# Altium PCB Manipulator.PcbDoc
Units mm, origin at the board's own origin, x right, y up, seen from the top; angles counter-clockwise.
Board outline 152.4 x 101.6 mm, 2 copper layers (Top Layer, Bottom Layer); 54 components, 41 nets, 186 pads, 0 vias.
Unrouted connection lines stored in the file: 137.
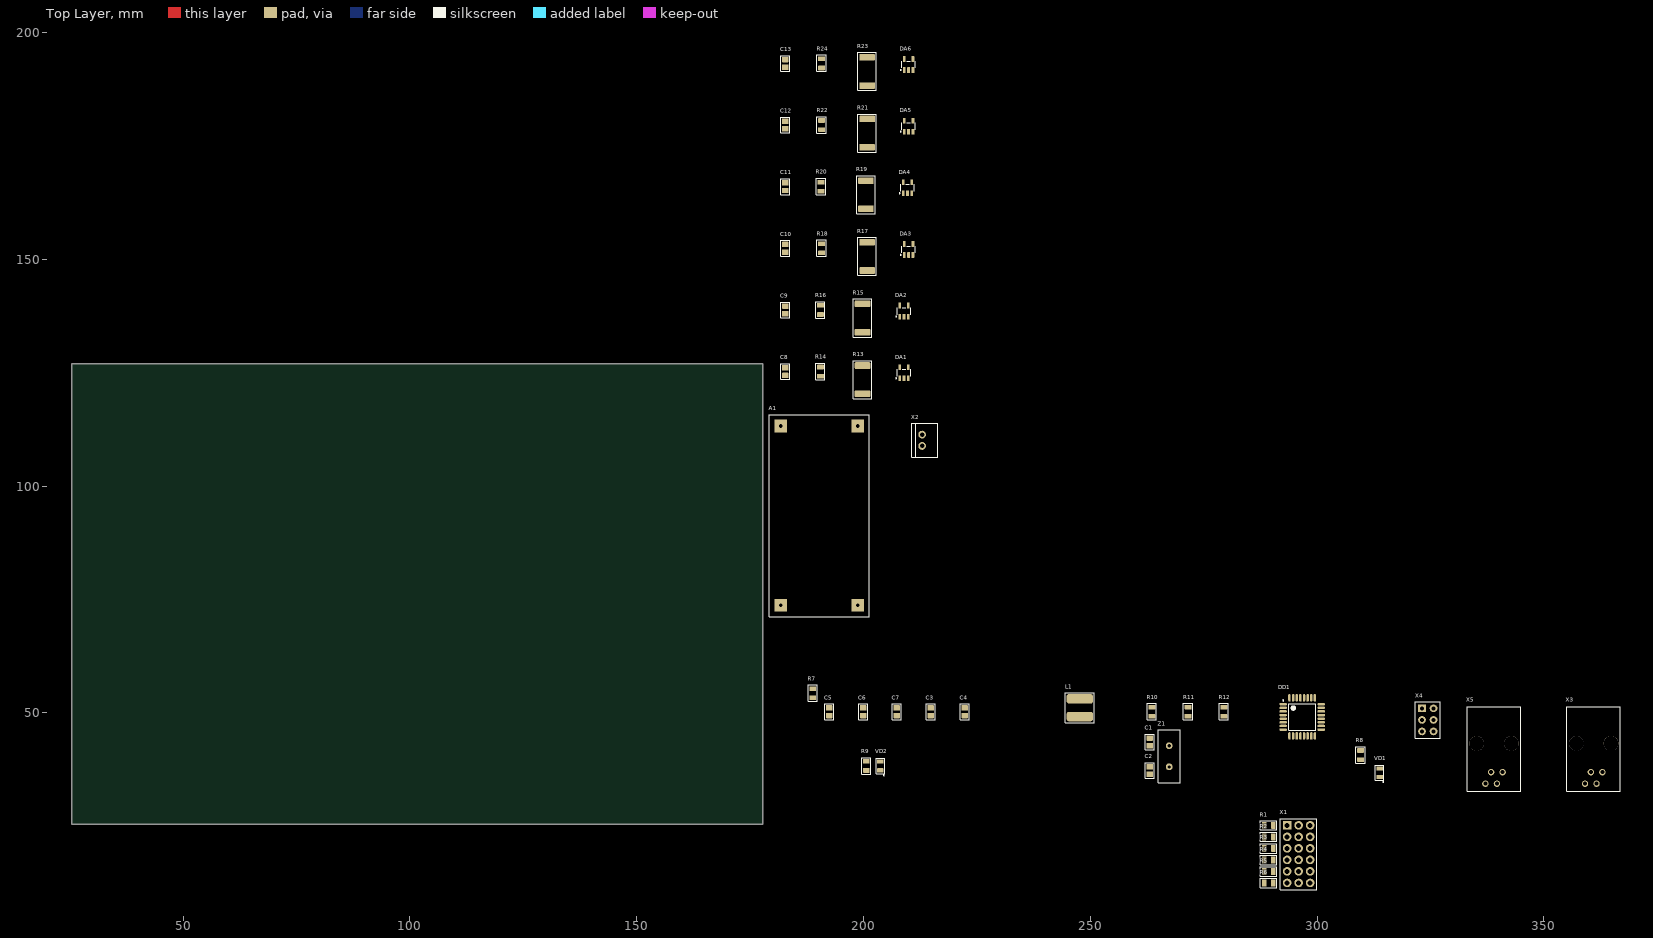
[diagram p0: Top Layer view]
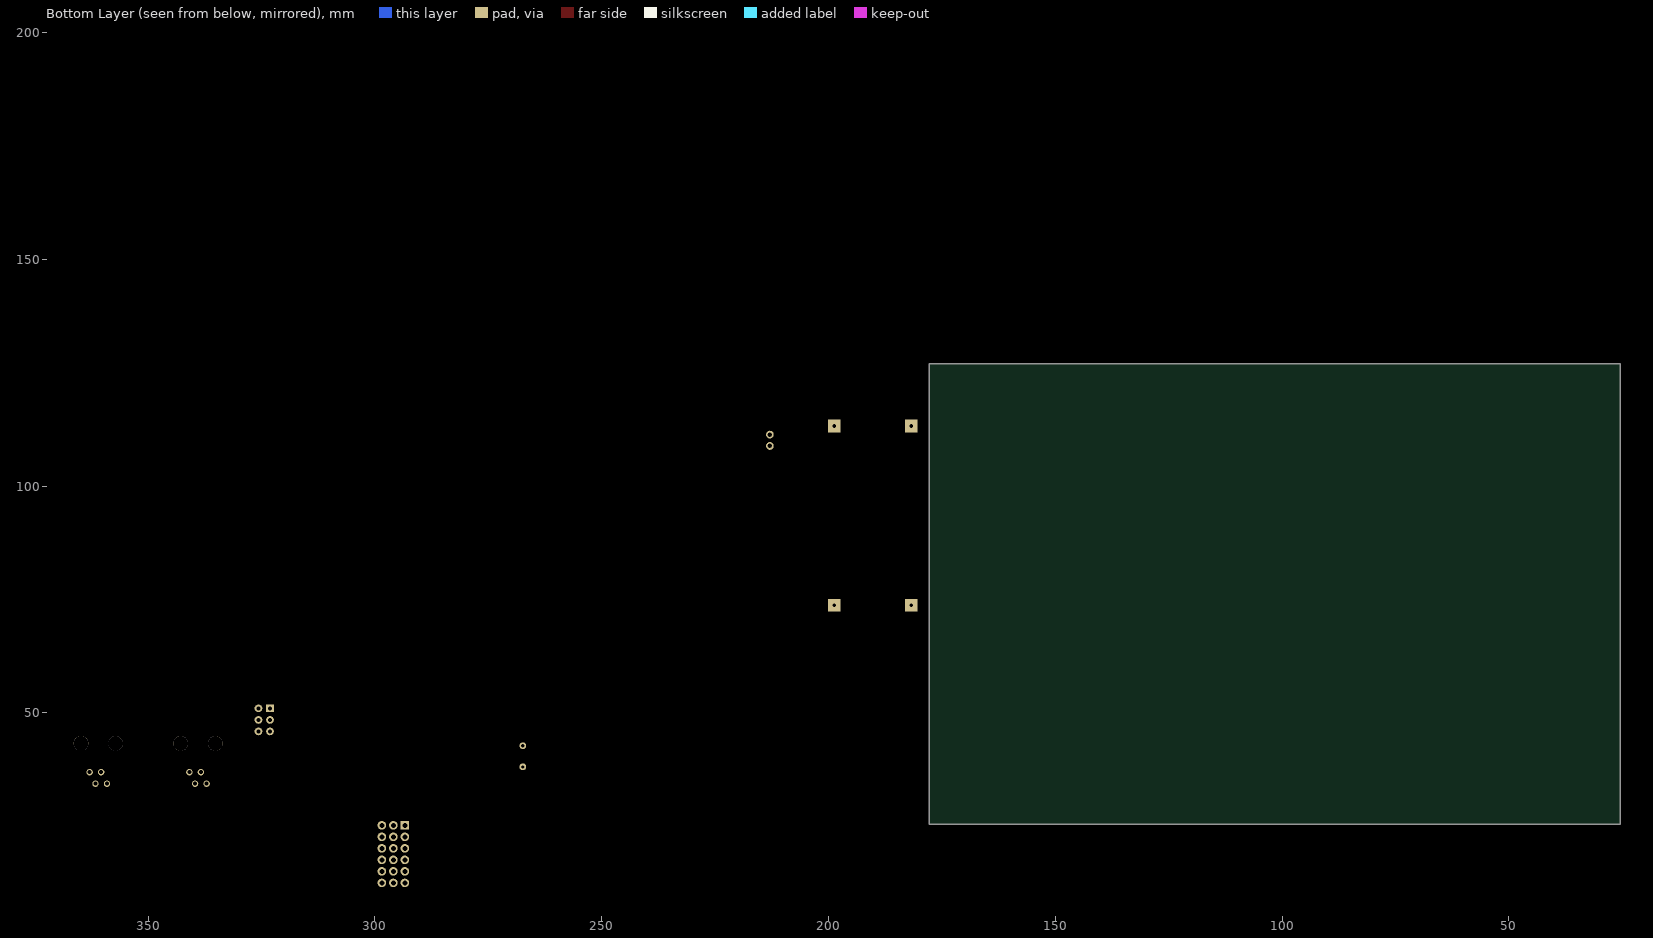
[diagram p1: Bottom Layer view, seen from below]

## Layer stack, top to bottom
Top Solder: solder mask 0.0102, Solder Resist, Dk 3.5
Top Layer: signal copper 0.0356
Dielectric 1: dielectric 0.32, FR-4, Dk 4.8
Bottom Layer: signal copper 0.0356
Bottom Solder: solder mask 0.0102, Solder Resist, Dk 3.5

## Board outline
25.4,25.4 177.8,25.4 177.8,127 25.4,127

## Design rules (kind name [scope] priority, off if disabled: settings)
Clearance Clearance_Edge [All vs OnLayer('Keep-Out Layer')] p1: gap=0.25 ignorepadtopadclearanceinfootprint=FALSE
Clearance "same Via to TH Pad" [isVia vs OnLayer('Multi-Layer')] p2: gap=0 ignorepadtopadclearanceinfootprint=TRUE except(0.3: THPad-Via)
Clearance non_Plated_hole_to_Poly [InPoly vs PadIsPlated = 'False'] p3: gap=0.15 ignorepadtopadclearanceinfootprint=TRUE except(0.125: Arc-Arc Arc-Track Arc-SMDPad Arc-THPad Arc-Via Arc-Text Track-Track Track-SMDPad Track-THPad Track-Via Track-Text SMDPad-Via SMDPad-Text THPad-THPad THPad-Via THPad-Text Via-Via Via-Text Fill-Text Poly-Text Region-Text Text-Text; 0.25: Arc-Hole Track-Hole SMDPad-Hole THPad-Hole Via-Hole Text-Hole; 0.35: Fill-Hole Poly-Hole Region-Hole; 0.7: SMDPad-SMDPad; 1: SMDPad-THPad)
Clearance Int_Layer [OnLayer('MidLayer 1','MidLayer 2','MidLayer 3','MidLayer 4','MidLayer 5','MidLayer 6','MidLayer 7','MidLayer 8','Signal Layer 1','Signal Layer 2','Signal Layer 3','Signal Layer 4','Signal Layer 5','Signal Layer 6','Signal Layer 7','Signal Layer 8')] p4: gap=0.125 ignorepadtopadclearanceinfootprint=FALSE except(0.2: Arc-Fill Arc-Poly Arc-Region Track-Fill Track-Poly Track-Region SMDPad-Fill SMDPad-Poly SMDPad-Region THPad-Fill THPad-Poly THPad-Region Via-Fill Via-Poly Via-Region Fill-Fill Fill-Poly Fill-Region Poly-Poly Poly-Region Region-Region; 0.25: Arc-Hole Track-Hole SMDPad-Hole THPad-Hole Via-Hole Fill-Hole Poly-Hole Region-Hole)
Clearance EXT_Layer [OnLayer('Top Layer','Bottom Layer')] p5: gap=0.125 ignorepadtopadclearanceinfootprint=TRUE except(0.1: THPad-THPad Via-Via; 0.15: Arc-Fill Arc-Poly Arc-Region Track-Fill Track-Poly Track-Region SMDPad-Fill SMDPad-Poly SMDPad-Region Via-Fill Via-Poly Via-Region Fill-Fill Fill-Poly Fill-Region Poly-Poly Poly-Region Region-Region; 0.25: Arc-Hole Track-Hole SMDPad-Hole THPad-Hole Via-Hole Fill-Hole Poly-Hole Region-Hole Text-Hole; 0.3: THPad-Via; 0.4: THPad-Fill THPad-Poly THPad-Region; 0.65: SMDPad-SMDPad; 1: SMDPad-THPad)
Clearance "same Via to SMD PAD" [isVia] p6: gap=0 ignorepadtopadclearanceinfootprint=TRUE except(0.1: THPad-THPad THPad-Via Via-Via; 0.15: SMDPad-Via; 0.65: SMDPad-SMDPad; 1: SMDPad-THPad)
Clearance THpad_to_SMDpad [OnLayer('Top Layer','Bottom Layer') vs OnLayer('Multi-Layer')] p7: gap=0 ignorepadtopadclearanceinfootprint=TRUE except(0.125: Arc-Arc Arc-Track Arc-SMDPad Arc-THPad Arc-Text Track-Track Track-SMDPad Track-THPad Track-Text SMDPad-Text THPad-THPad THPad-Text Via-Via Via-Text Fill-Text Poly-Text Region-Text Text-Text; 0.3: THPad-Via; 0.7: SMDPad-SMDPad; 1: SMDPad-THPad)
PolygonConnect [All] p1: connectstyle=Relief reliefconductorwidth=0.254 reliefentries=4 polygonreliefangle="90 Angle" airgapwidth=0.254
RoomDefinition Main_Scheme [InComponentClass('Main_Scheme')] p1: confinementstyle=ConfineIn formatcopy=TRUE lockcomponents=FALSE outline 178.943,70.993 216.662,70.993 216.662,117.475 178.943,117.475
RoomDefinition M13 [InComponentClass('M13')] p2: confinementstyle=ConfineIn formatcopy=TRUE lockcomponents=FALSE outline 178.943,186.69 213.36,186.69 213.36,199.009 178.943,199.009
RoomDefinition M12 [InComponentClass('M12')] p3: confinementstyle=ConfineIn formatcopy=TRUE lockcomponents=FALSE outline 178.943,173.101 213.36,173.101 213.36,185.42 178.943,185.42
RoomDefinition M11 [InComponentClass('M11')] p4: confinementstyle=ConfineIn formatcopy=TRUE lockcomponents=FALSE outline 178.943,159.512 213.106,159.512 213.106,171.831 178.943,171.831
RoomDefinition M10 [InComponentClass('M10')] p5: confinementstyle=ConfineIn formatcopy=TRUE lockcomponents=FALSE outline 178.943,145.923 213.36,145.923 213.36,158.242 178.943,158.242
RoomDefinition M9 [InComponentClass('M9')] p6: confinementstyle=ConfineIn formatcopy=TRUE lockcomponents=FALSE outline 178.943,132.334 212.344,132.334 212.344,144.653 178.943,144.653
RoomDefinition M8 [InComponentClass('M8')] p7: confinementstyle=ConfineIn formatcopy=TRUE lockcomponents=FALSE outline 178.943,118.745 212.344,118.745 212.344,131.064 178.943,131.064
RoomDefinition M7 [InComponentClass('M7')] p8: confinementstyle=ConfineIn formatcopy=TRUE lockcomponents=FALSE outline 188.623,32.336 367.312,32.336 367.312,56.085 188.623,56.085
RoomDefinition M6 [InComponentClass('M6')] p9: confinementstyle=ConfineIn formatcopy=TRUE lockcomponents=FALSE outline 244.096,10.718 300.103,10.718 300.103,28.498 244.096,28.498
RoutingVias [All] p1: holewidth=0.711 width=1.27 viastyle="Through Hole" minholewidth=0.711 minwidth=1.27 maxholewidth=0.711 maxwidth=1.27
SolderMaskExpansion [All] p1: expansion=0.102
Width [All] p1: maxlimit=0.254 minlimit=0.254 preferedwidth=0.254
30 further rules are at their usual default settings.

## Classes and differential pairs
channel class Current_Sense: M8 M9 M10 M11 M12 M13
component class Main_Scheme: A1 R7 X2
net class SERVO_SENSE_[0..5]: SERVO_SENSE_0 SERVO_SENSE_1 SERVO_SENSE_2 SERVO_SENSE_3 SERVO_SENSE_4 SERVO_SENSE_5
net class ADC_OUT_[0..5]: ADC_OUT_0 ADC_OUT_1 ADC_OUT_2 ADC_OUT_3 ADC_OUT_4 ADC_OUT_5
component class M7: C1 C2 C3 C4 C5 C6 C7 DD1 L1 R8 R9 R10 R11 R12 VD1 VD2 X3 X4 X5 Z1
component class M6: R1 R2 R3 R4 R5 R6 X1
component class M8: C8 DA1 R13 R14
component class M9: C9 DA2 R15 R16
component class M10: C10 DA3 R17 R18
component class M11: C11 DA4 R19 R20
component class M12: C12 DA5 R21 R22
component class M13: C13 DA6 R23 R24

## Components (designator, comment, footprint, x,y, rotation, side; value= is the part's Value field where it differs from the comment)
A1 "Module LM2596" "module LM2596" 190.246,93.472 r90 top
C1 "Capacitor" C0805 263.08,43.589 r270 top value=22
C2 "Capacitor" C0805 263.08,37.289 r90 top value=22
C3 "Capacitor" C0805 214.785,50.243 r90 top value=0,1мк
C4 "Capacitor" C0805 222.278,50.243 r90 top value=0,1мк
C5 "Capacitor" C0805 192.433,50.243 r90 top value=0,1мк
C6 "Capacitor" C0805 199.926,50.243 r90 top value=0,1мк
C7 "Capacitor" C0805 207.292,50.243 r90 top value=0,1мк
C8 "0,1мк" C0805 182.753,125.222 r90 top
C9 "0,1мк" C0805 182.753,138.811 r90 top (schematic designator C8)
C10 "0,1мк" C0805 182.753,152.4 r90 top (schematic designator C8)
C11 "0,1мк" C0805 182.753,165.989 r90 top (schematic designator C8)
C12 "0,1мк" C0805 182.753,179.578 r90 top (schematic designator C8)
C13 "0,1мк" C0805 182.753,193.167 r90 top (schematic designator C8)
DA1 "#NAME?" SOT23-5 208.915,124.968 r90 top
DA2 "#NAME?" SOT23-5 208.915,138.557 r90 top (schematic designator DA1)
DA3 "#NAME?" SOT23-5 209.931,152.146 r90 top (schematic designator DA1)
DA4 "#NAME?" SOT23-5 209.677,165.735 r90 top (schematic designator DA1)
DA5 "#NAME?" SOT23-5 209.931,179.324 r90 top (schematic designator DA1)
DA6 "#NAME?" SOT23-5 209.931,192.913 r90 top (schematic designator DA1)
DD1 "ATmega328P-AU" TQFP-32 296.7,49.1 r0 top
L1 "Inductor" SDR0604 247.678,51.132 r0 top value=120мкГн
R1 "Resistor_0,125Вт" R0805 289.327,25.196 r180 top value=47
R2 "Resistor_0,125Вт" R0805 289.327,22.656 r180 top value=47
R3 "Resistor_0,125Вт" R0805 289.327,20.116 r180 top value=47
R4 "Resistor_0,125Вт" R0805 289.327,17.576 r180 top value=47
R5 "Resistor_0,125Вт" R0805 289.327,15.036 r180 top value=47
R6 "Resistor_0,125Вт" R0805 289.327,12.496 r180 top value=47
R7 "Resistor_0,125Вт" R0805 188.8,54.3 r90 top value=0 (schematic designator R11)
R8 "Resistor_0,125Вт" R0805 309.58,40.689 r90 top value=510 (schematic designator R12)
R9 "Resistor_0,125Вт" R0805 200.6,38.3 r270 top value=510 (schematic designator R7)
R10 "Resistor_0,125Вт" R0805 263.553,50.243 r90 top value=100к (schematic designator R8)
R11 "Resistor_0,125Вт" R0805 271.554,50.243 r90 top value=100к (schematic designator R9)
R12 "Resistor_0,125Вт" R0805 279.428,50.243 r90 top value=10к (schematic designator R10)
R13 "Resistor_1Вт" R2512 199.771,123.444 r90 top value=0,1
R14 "Resistor_0,125Вт" R0805 190.5,125.222 r90 top value=16к
R15 "Resistor_1Вт" R2512 199.771,137.033 r90 top value=0,1 (schematic designator R13)
R16 "Resistor_0,125Вт" R0805 190.5,138.811 r90 top value=16к (schematic designator R14)
R17 "Resistor_1Вт" R2512 200.787,150.622 r90 top value=0,1 (schematic designator R13)
R18 "Resistor_0,125Вт" R0805 190.754,152.4 r90 top value=16к (schematic designator R14)
R19 "Resistor_1Вт" R2512 200.533,164.211 r90 top value=0,1 (schematic designator R13)
R20 "Resistor_0,125Вт" R0805 190.627,165.989 r90 top value=16к (schematic designator R14)
R21 "Resistor_1Вт" R2512 200.787,177.8 r90 top value=0,1 (schematic designator R13)
R22 "Resistor_0,125Вт" R0805 190.754,179.578 r90 top value=16к (schematic designator R14)
R23 "Resistor_1Вт" R2512 200.787,191.389 r90 top value=0,1 (schematic designator R13)
R24 "Resistor_0,125Вт" R0805 190.754,193.167 r90 top value=16к (schematic designator R14)
VD1 "LED" L_0805 313.78,36.789 r90 top (schematic designator VD2)
VD2 "LED" L_0805 203.7,38.3 r90 top (schematic designator VD1)
X1 "PLT-18" PLT-18 293.372,25.196 r0 top
X2 "" CWF-2 213.36,110.109 r0 top
X3 "Header_4_sct" RJ9_4P4C 360.962,43.258 r0 top
X4 "Программатор" PLS2-6 324.386,48.338 r0 top
X5 "Header_4_sct" RJ9_4P4C 338.991,43.258 r0 top
Z1 "Crystal" HC-49S 267.38,40.414 r90 top

## Footprints (in the part's own frame and the unit in brackets; to place one, negate y for a bottom-side part, rotate by r counter-clockwise, add the part's x,y. Pads: shape width x height; smd on the part's side, far side on the other; paste and mask are expansions set on the pad)
C0805 [mm]
  rrect25% 1.21x1.46 smd paste-5: 1(-0.845,0) 2(0.845,0)
  silkscreen extent -1.73,-1 1.73,1, body extent -1,-0.62 1,0.63, height 0.78
CWF-2 [mm]
  round 1.7 hole 1: 1(-0.45,-1.275) 2(-0.45,1.225)
  silkscreen extent -2.75,-3.77 2.95,3.73, body extent -2.7,-3.73 3,3.78, height 7.7
HC-49S [mm] "Кварцевый резонатор"
  round 1.5 hole 0.7: 1(-2.325,0) 2(2.325,0)
  silkscreen extent -5.8,-2.4 5.8,2.4, body extent -5.67,-2.32 5.68,2.33, height 3.6
L_0805 [mm] "SMD LED LAMP"
  rrect25% 0.91x1.46 smd: 1(-0.975,0) 2(0.975,0)
  silkscreen extent -2.15,-0.95 1.68,0.95, body extent -1.01,-0.62 1.01,0.63, height 1.1
"module LM2596" [mm]
  rect 2.8x2.8 hole 0.8: 1(-19.75,8.5) 2(-19.75,-8.5) 3(19.75,8.5) 4(19.75,-8.5)
  silkscreen extent -22.25,-11 22.25,11, body extent -21.75,-10.5 21.75,10.5, height 15.41
PLS2-6 [mm] "Разъем для программатора ISP"
  rect 1.7x1.7 hole 0.9: 1(-1.275,2.64)
  round 1.7 hole 0.9: 2(1.265,2.64) 3(-1.275,0.1) 4(1.265,0.1) 5(-1.275,-2.44) 6(1.265,-2.44)
  silkscreen extent -2.73,-3.9 2.77,4.1, body extent -2.52,-3.72 2.56,3.9, height 8.54
PLT-18 [mm]
  rect 1.9x1.9 hole 1.1: 1(0,0)
  round 1.9 hole 1.1: 2(2.54,0) 3(5.08,0) 4(0,-2.54) 5(2.54,-2.54) 6(5.08,-2.54) 7(0,-5.08) 8(2.54,-5.08) 9(5.08,-5.08) 11(2.54,-7.62) 12(5.08,-7.62) 13(0,-10.16) 14(2.54,-10.16) 15(5.08,-10.16) 16(0,-12.7) 17(2.54,-12.7) 18(5.08,-12.7)
  round 1.9 hole 1.1 mask+0.102: 10(0,-7.62)
  silkscreen extent -1.5,-14.2 6.5,1.5, body extent -1.31,-13.95 6.31,1.29, height 8.54
R0805 [mm] "Chip Resistor, 2-Leads, Body 2,10x1,30mm, IPC Medium Density"
  rrect25% 1.02x1.53 smd paste-5: 1(-1.008,0) 2(1.008,0)
  silkscreen extent -1.78,-1 1.85,1.02, body extent -1.1,-0.7 1.1,0.7, height 0.55
R2512 [mm]
  rrect25% 1.45x3.43 smd: 1(-3.115,0) 2(3.115,0)
  silkscreen extent -4.2,-2 4.2,2.05, body extent -3.35,-1.6 3.35,1.6, height 0.55
RJ9_4P4C [mm]
  round 1.398 hole 0.89: 1(-1.905,-8.89) 2(-0.635,-6.35) 3(0.635,-8.89) 4(1.905,-6.35)
  round 3.25 hole 3.25 unplated: ""(-3.81,0) ""(3.81,0)
  silkscreen extent -5.9,-10.5 5.9,8.1, body extent -5.59,-10.15 5.59,7.85, height 11.65
SDR0604 [mm] "SMD Power Inductors"
  rrect50% 5.8x2.1 smd: 1(0,1.95) 2(0,-1.95)
  silkscreen extent -3.2,-3.27 3.2,3.25, body extent -2.8,-2.75 2.8,2.75, height 4.55
SOT23-5 [mm]
  rrect25% 1.26x0.61 smd: 1(-1.225,0.95) 2(-1.225,0) 3(-1.225,-0.95) 4(1.225,-0.95) 5(1.225,0.95)
  silkscreen extent -1.3,-1.52 0.75,1.84, body extent -1.6,-1.56 1.6,1.55, height 1.45
TQFP-32 [mm] "Thin QFP, 32-Leads, Body 7x7mm, Pitch 0.8mm, IPC Medium Density"
  oval 1.65x0.55 smd: 1(-4.2,2.8) 2(-4.2,2) 3(-4.2,1.2) 4(-4.2,0.4) 5(-4.2,-0.4) 6(-4.2,-1.2) 7(-4.2,-2) 8(-4.2,-2.8) 17(4.2,-2.8) 18(4.2,-2) 19(4.2,-1.2) 20(4.2,-0.4) 21(4.2,0.4) 22(4.2,1.2) 23(4.2,2) 24(4.2,2.8)
  oval 0.55x1.65 smd: 9(-2.8,-4.2) 10(-2,-4.2) 11(-1.2,-4.2) 12(-0.4,-4.2) 13(0.4,-4.2) 14(1.2,-4.2) 15(2,-4.2) 16(2.8,-4.2) 25(2.8,4.2) 26(2,4.2) 27(1.2,4.2) 28(0.4,4.2) 29(-0.4,4.2) 30(-1.2,4.2) 31(-2,4.2) 32(-2.8,4.2)
  silkscreen extent -4.32,-2.95 2.95,3.75, body extent -4.6,-4.6 4.6,4.6, height 1.2

## Part data
A1: library part module0, "Low-Dropout Regulator for 5-V to 3.3-V Conversion", Part Name=LM2596, id=module0
C1 C2: library part cap223, "Конденсатор", Manufacture=Murata, Part Name=Ceramic, Part Number=GRM21A5C2E220JW01D, Voltage=50В, id=cap223, TKE=X7R
C3 C4 C5 C6 C7: library part cap161, "Конденсатор", Part Name=Capacitors, Part Number=GRM21BR71H104KA01L, id=cap161, TKE=X7R
C8 C9 C10 C11 C12 C13: library part cap160, "Конденсатор", Voltage=50В, id=cap160
DA1 DA2 DA3 DA4 DA5 DA6: library part amp3, "Измерительный датчик тока", Input Bias Current=10uA, Manufacture="Texas Instruments", Offset voltage=0,2mB, Part Name="Measurement Current Shunt Monitor", Part Number=INA139NA/250, Supply Current max=60uA, Supply Voltage=2,7-5-40B, Bandwidth="rout=20  220kHz", Channels=1, CMRR=115dB, id=amp3, Rail-to-rail=independent
DD1: library part microcont1, "Микроконтроллер 8-Бит, picoPower, AVR, 20МГц, 32КБ Flash", Frequency=20MHz, Part Name=Microcontroller, Power Supply="1.8-5.5 V", ADC=8x10b, Flash=32kb, id=microcont1, Interface="i2c, spi, uart", Part Number=ATmega328P-AU, Pin in=23
L1: library part ind55, "EMI Suppression Filter", Manufacture=Bourns, Part Name="SMD Power Inductors", Part Number="SDR0604- 121KL", Rated Current=0,48A, Resistance=0,93Ohm, Saturation Current=0,6A, id=ind55
R1 R2 R3 R4 R5 R6: library part res41, "Резистор", Manufacture=Yageo, Part Name=Resistor, Part Number=RC0805FR-0747RL, Power=0,125Вт, Accuracy=0,01, id=res41
R7: library part res0, "Резистор", Manufacture=Yageo, Part Name=Resistor, Part Number=RC0805FR-070RL, Power=0,125Вт, Accuracy=0.01, id=res0
R8 R9: library part res66, "Резистор", Manufacture=Yageo, Part Name=Resistor, Part Number=RC0805FR-07510RL, Power=0,125Вт, Accuracy=0,01, id=res66
R10 R11: library part res125, "Резистор", Manufacture=Yageo, Part Name=Resistor, Part Number=RC0805FR-07100KL, Power=0,125Вт, Accuracy=0,01, id=res125
R12: library part res97, "Резистор", Manufacture=Yageo, Part Name=Resistor, Part Number=RC0805FR-0710KL, Power=0,125Вт, Accuracy=0,01, id=res97
R13 R15 R17 R19 R21 R23: library part res1245, "Резистор", id=res1245
R14 R16 R18 R20 R22 R24: library part res106, "Резистор", id=res106
VD1 VD2: library part diode5, "Светодиод", Part Number=KP-2012EC, id=diode5, Part Name=LED
X1: library part connect129, "Разъем - 18 конт. вилка", Manufacture="Ningbo connfly electronic", Part Number=PLT-81, Contact_1=Contact_1, Contact_2=Contact_2, Contact_3=Contact_3, Contact_4=Contact_4, Contact_5=Contact_5, Contact_6=Contact_6, Contact_7=Contact_7, Contact_8=Contact_8, Contact_9=Contact_9, Contact_10=Contact_10, Contact_11=Contact_11, Contact_12=Contact_12, Contact_13=Contact_13, Contact_14=Contact_14, Contact_15=Contact_15, Contact_16=Contact_16, Contact_17=Contact_17, Contact_18=Contact_18, Contact_19=Contact_19, Contact_20=Contact_20, Etch=2.54mm, id=connect129, Part Name=PLT-18
X2: library part connect15, "Разъем - 2 конт. вилка", Manufacture="Ningbo connfly electronic", Part Name=CWF-2, Part Number=DS1069-2MVW6X, Contact_1=GND, Contact_2=12B, Etch=2,5mm, id=connect15
X3 X5: library part connect72, "Разъем - 4 конт. розетка", Part Name=Rj9, Contact_1=VCC, Contact_2=SCL, Contact_3=SDA, Contact_4=GND, id=connect72
X4: library part connect0, "Разъем - 6 конт. розетка", Part Name=MKII, Contact_1=MISO, Contact_2=5B, Contact_3=SCK, Contact_4=MOSI, Contact_5=RESET, Contact_6=GND, id=connect0
Z1: library part crystal7, "Кварцевый резонатор", Frequence=16MHz, Part Number=16.000MHzHC-49US, id=crystal7

## Nets (pads, with @x,y where several pads share a name; then routed paths per layer and width w, separated by ;. In a path a pad name is that pad's centre, name@x,y a point inside that pad or via, vN(x,y) a via of type N, cw(c..) or ccw(c..) an arc to the next point about the centre after c; other vN are vias at no path point)
5В: C3.2 C7.2 C8.2 C9.2 C10.2 C11.2 C12.2 C13.2 DA1.5 DA2.5 DA3.5 DA4.5 DA5.5 DA6.5 DD1.4 DD1.6 L1.2 R8.2 R10.2 R11.2 R12.2 X3.1 X4.2 X5.1
6В_SERVO: A1.3 DA1.3 DA2.3 DA3.3 DA4.3 DA5.3 DA6.3 R13.1 R15.1 R17.1 R19.1 R21.1 R23.1
12В: A1.1 X2.2
ADC_OUT_0: DA1.1 DD1.23 R14.2
ADC_OUT_1: DA2.1 DD1.24 R16.2
ADC_OUT_2: DA3.1 DD1.25 R18.2
ADC_OUT_3: DA4.1 DD1.26 R20.2
ADC_OUT_4: DA5.1 DD1.19 R22.2
ADC_OUT_5: DA6.1 DD1.22 R24.2
AGND: C8.1 C9.1 C10.1 C11.1 C12.1 C13.1 DA1.2 DA2.2 DA3.2 DA4.2 DA5.2 DA6.2 R7.2 R14.1 R16.1 R18.1 R20.1 R22.1 R24.1
GND: A1.2 A1.4 C1.1 C2.1 C3.1 C4.1 C5.1 C6.1 C7.1 DD1.3 DD1.5 DD1.21 R7.1 VD1.1 VD2.1 X1.3 X1.6 X1.9 X1.12 X1.15 X1.18 X2.1 X3.4 X4.6 X5.4
MISO: DD1.16 X4.1
MOSI: DD1.15 X4.4
NetC1_2: C1.2 DD1.7 Z1.2
NetC2_2: C2.2 DD1.8 Z1.1
NetC5_2: C5.2 C6.2 DD1.18 DD1.20 L1.1
NetDD1_1: DD1.1 R4.2
NetDD1_2: DD1.2 R5.2
NetDD1_9: DD1.9 R6.2
NetDD1_12: DD1.12 R9.2
NetDD1_30: DD1.30 R1.2
NetDD1_31: DD1.31 R2.2
NetDD1_32: DD1.32 R3.2
NetR1_1: R1.1 X1.1
NetR2_1: R2.1 X1.4
NetR3_1: R3.1 X1.7
NetR4_1: R4.1 X1.10
NetR5_1: R5.1 X1.13
NetR6_1: R6.1 X1.16
NetR8_1: R8.1 VD1.2
NetR9_1: R9.1 VD2.2
RESET: C4.2 DD1.29 R12.1 X4.5
SCK: DD1.17 X4.3
SCL: DD1.28 R11.1 X3.2 X5.2
SDA: DD1.27 R10.1 X3.3 X5.3
SERVO_SENSE_0: DA1.4 R13.2 X1.2
SERVO_SENSE_1: DA2.4 R15.2 X1.5
SERVO_SENSE_2: DA3.4 R17.2 X1.8
SERVO_SENSE_3: DA4.4 R19.2 X1.11
SERVO_SENSE_4: DA5.4 R21.2 X1.14
SERVO_SENSE_5: DA6.4 R23.2 X1.17
pads on no net: DD1.10 DD1.11 DD1.13 DD1.14 X3. X5.